# EAGLE board covid-respirator-ProtoB (EAGLE 7.3.0)

Size 160 x 100 mm. Coordinates in mm from the lower left corner, seen from the top.
Outline: 0,0 160,0 160,100 0,100 0,0
Copper layers (1*16): Top 0.035mm / dielectric 1.5mm / Bottom 0.035mm
Design rules "default": minimum track width 10mil, minimum drill 24mil, track to track 8mil, track to pad 8mil, pad to pad 8mil, via to via 8mil, smd to smd 8mil, copper to edge 40mil, drill to drill 8mil, minimum pad ring 10mil, minimum via ring 8mil, stop-mask expansion 4mil, vias tented up to drill 0mil, thermal gap 10mil

## Footprints (pad centres in the part's own frame; a part is rotated, then mirrored left to right if it is on the bottom)
AB9V = drill 1.118 pad 3.15 octagon: + 0,2.54; - 0,-2.54
150CLZ-1010 = smd 4.3 x 2.5: + 4.15,0; - -4.15,0
C050-050X075 = drill 0.813 octagon: 1 -2.54,0; 2 2.54,0
SO8 = smd 0.6 x 2.2: 1 -1.905,-2.6; 2 -0.635,-2.6; 3 0.635,-2.6; 4 1.905,-2.6; 5 1.905,2.6; 6 0.635,2.6; 7 -0.635,2.6; 8 -1.905,2.6
TO220H = drill 1.118 long: 1 -2.54,-10.16; 2 0,-10.16; 3 2.54,-10.16 | hole 3.302: 0,4.826
HY-1602F = drill 1 pad 1.93 long: 1 2.54,0; 2 5.08,0; 3 7.62,0; 4 10.16,0; 5 12.7,0; 6 15.24,0; 7 17.78,0; 8 20.32,0; 9 22.86,0; 10 25.4,0; 11 27.94,0; 12 30.48,0; 13 33.02,0; 14 35.56,0; 15 38.1,0; 16 40.64,0 | hole 2.5: -2.96,0; 72.04,0; -2.96,-31; 72.04,-31
LED3MM = drill 0.813 octagon: A -1.27,0; K 1.27,0
0207/10 = drill 0.813 octagon: 1 -5.08,0; 2 5.08,0
TL3XYO = drill 1.1 pad 1.422 long: 1 -2.54,0; 2 0,0; 3 2.54,0 | drill 1.1 pad 1.676: M1 -5.08,0; M2 5.08,0
F/EB20P = drill 1.016 pad 2.159 octagon: + 12.7,0; - -12.7,0
TO92-CBE = drill 0.813 long: B 0,0; C -2.54,0; E 2.54,0

## Placement (x,y rotation side)
BATTERY  12V  [AB9V]  -17.78,30.48 0 top  (outside the outline)
C1  47uF/25V  [150CLZ-1010]  -30.48,30.48 0 top  (outside the outline)
C2  10uF/25v  [150CLZ-1010]  -44.45,30.48 0 top  (outside the outline)
C3  100nF  [C050-050X075]  -16.51,39.37 0 top  (outside the outline)
C4  100nF  [C050-050X075]  -25.4,39.37 0 top  (outside the outline)
C5  47uF/6V  [150CLZ-1010]  -78.74,-328.93 0 top  (outside the outline)
C6  47uF/6V  [150CLZ-1010]  -78.74,-340.36 0 top  (outside the outline)
C7  10uF  [150CLZ-1010]  -78.74,-351.79 0 top  (outside the outline)
C8  10uF  [150CLZ-1010]  -78.74,-363.22 0 top  (outside the outline)
C9  10uF/25v  [150CLZ-1010]  -78.74,-424.18 0 top  (outside the outline)
C10  100nF  [C050-050X075]  -81.28,-434.34 0 top  (outside the outline)
C11  100nF  [C050-050X075]  -81.28,-441.96 0 top  (outside the outline)
C12  47uF/6V  [150CLZ-1010]  -78.74,-450.85 0 top  (outside the outline)
C13  10uF  [150CLZ-1010]  -78.74,-462.28 0 top  (outside the outline)
IC1  [SO8]  -72.39,-45.72 0 top  (outside the outline)
IC2  L7805CV-DG  [TO220H]  -33.02,12.7 0 top  (outside the outline)
IC3  AD8607R  [SO8]  -72.39,-66.04 0 top  (outside the outline)
IC4  AD8607R  [SO8]  -72.39,-76.2 0 top  (outside the outline)
LCD1  LCD_2X16_SIL  [HY-1602F]  -69.85,-95.25 0 top  (outside the outline)
LED1  ROUGE  [LED3MM]  -82.55,-279.4 0 top  (outside the outline)
LED2  VERTE  [LED3MM]  -82.55,-284.48 0 top  (outside the outline)
LED3  JAUNE  [LED3MM]  -82.55,-314.96 0 top  (outside the outline)
R1  1.5k  [0207/10]  -71.12,-83.82 0 top  (outside the outline)
R2  4k7  [0207/10]  -19.05,45.72 0 top  (outside the outline)
R3  1k  [0207/10]  -31.75,45.72 0 top  (outside the outline)
R4  1.5k  [0207/10]  -71.12,-88.9 0 top  (outside the outline)
R5  100  [0207/10]  -19.05,50.8 0 top  (outside the outline)
R6  12k  [0207/10]  -62.23,-27.94 0 top  (outside the outline)
R7  1.2k  [0207/10]  -62.23,-33.02 0 top  (outside the outline)
R8  150  [0207/10]  -71.12,-133.35 0 top  (outside the outline)
R9  150  [0207/10]  -71.12,-53.34 0 top  (outside the outline)
R10  680  [0207/10]  -71.12,-58.42 0 top  (outside the outline)
R11  9k1  [0207/10]  -78.74,-476.25 0 top  (outside the outline)
R12  68k  [0207/10]  -78.74,-229.87 0 top  (outside the outline)
R13  33k  [0207/10]  -78.74,-234.95 0 top  (outside the outline)
R14  22k  [0207/10]  -78.74,-240.03 0 top  (outside the outline)
R15  12k  [0207/10]  -78.74,-245.11 0 top  (outside the outline)
R16  8.2k  [0207/10]  -78.74,-275.59 0 top  (outside the outline)
R17  8.2k  [0207/10]  -78.74,-255.27 0 top  (outside the outline)
R18  5.6k  [0207/10]  -78.74,-260.35 0 top  (outside the outline)
R19  3.3k  [0207/10]  -78.74,-265.43 0 top  (outside the outline)
R20  2.2k  [0207/10]  -78.74,-270.51 0 top  (outside the outline)
R21  270  [0207/10]  -78.74,-290.83 0 top  (outside the outline)
R22  270  [0207/10]  -78.74,-295.91 0 top  (outside the outline)
R23  10k  [0207/10]  -78.74,-300.99 0 top  (outside the outline)
R24  10k  [0207/10]  -78.74,-306.07 0 top  (outside the outline)
R25  10k  [0207/10]  -78.74,-311.15 0 top  (outside the outline)
R26  270  [0207/10]  -78.74,-321.31 0 top  (outside the outline)
R27  10k  [0207/10]  -78.74,-406.4 0 top  (outside the outline)
R28  10k  [0207/10]  -78.74,-411.48 0 top  (outside the outline)
R29  10k  [0207/10]  -78.74,-416.56 0 top  (outside the outline)
R30  10k  [0207/10]  -78.74,-471.17 0 top  (outside the outline)
R31  330  [0207/10]  -78.74,-481.33 0 top  (outside the outline)
S1  TL32YO  [TL3XYO]  -78.74,-140.97 0 top  (outside the outline)
S2  TL32YO  [TL3XYO]  -78.74,-152.4 0 top  (outside the outline)
S3  TL32YO  [TL3XYO]  -78.74,-163.83 0 top  (outside the outline)
S4  TL32YO  [TL3XYO]  -78.74,-175.26 0 top  (outside the outline)
S5  TL32YO  [TL3XYO]  -78.74,-186.69 0 top  (outside the outline)
S6  TL32YO  [TL3XYO]  -78.74,-198.12 0 top  (outside the outline)
S7  TL32YO  [TL3XYO]  -78.74,-209.55 0 top  (outside the outline)
S8  TL32YO  [TL3XYO]  -78.74,-220.98 0 top  (outside the outline)
S9  TL32YO  [TL3XYO]  -78.74,-374.65 0 top  (outside the outline)
S10  TL32YO  [TL3XYO]  -78.74,-386.08 0 top  (outside the outline)
S11  TL32YO  [TL3XYO]  -78.74,-397.51 0 top  (outside the outline)
SG1  [F/EB20P]  -36.83,-12.7 0 top  (outside the outline)
T2  BC548  [TO92-CBE]  -64.77,-20.32 0 top  (outside the outline)

## Library data of the parts
BATTERY = battery
C1-C13 R1-R31 = rcl
IC1 = analog-devices; MF: ALTERA CORPORATION; MPN: AD825ARZ; OC_FARNELL: 9603735; OC_NEWARK: 59K6528
IC2 = linear
IC3 IC4 = analog-devices; MPN: AD8607ARMZ-R2; OC_FARNELL: 1651293; OC_NEWARK: 19M8927
LCD1 = lcd_2x16_led_backlight
LED1-LED3 = led
S1-S11 = switch
SG1 = buzzer; OC_FARNELL: unknown; OC_NEWARK: unknown
T2 = transistor

## Nets
6546876: C4.1 IC1.3 R5.1
+3.3VNUCLEO: R16.1 S9.2 S10.2 S11.2
+5V_S1: C5.+
+5V_S2: C6.+ C12.+
+5VNUCLEO: IC3.4 IC4.8 LCD1.2 R1.1 R8.1 R11.2
+12V: C1.+ C7.+ C8.+ C10.1 C11.1 C13.+ IC2.1 R2.2 SG1.+
A0: R12.2 R13.2 R14.2 R15.2 R16.2 R17.2 R18.2 R19.2 R20.2
A1: R9.1 R10.1
A2: R2.1 R3.2
AGND: C1.- C2.- C3.2 C4.2 C11.2 IC1.4 IC2.2 R10.2
AREF: C2.+ C3.1 IC1.7 IC2.3
D2: IC3.3 R24.1
D3: IC4.5 R30.1
D4: IC3.5 R23.1
D5: IC4.3 R25.1
D7: LCD1.4
D8: LCD1.6
D9: LCD1.11
D10: LCD1.12
D11: LCD1.13
D12: LCD1.14
D13: R7.2
E5V: C9.+
GND: C5.- C6.- C7.- C8.- C9.- C10.2 C12.- C13.- IC3.8 IC4.4 LCD1.1 LCD1.5 LCD1.16 R3.1 R4.2 R6.2 R21.2 R22.2 R23.2 R24.2 R25.2 R26.2 R27.2 R28.2 R29.2 R30.2 R31.1 S1.2 S2.2 S3.2 S4.2 S5.2 S6.2 S7.2 S8.2 T2.E
N$1: IC4.1
N$2: BATTERY.-
N$3: BATTERY.+
N$4: IC3.2 IC3.6 IC4.2 IC4.6 R1.2 R4.1
N$5: IC3.1
N$6: IC3.7
N$7: LCD1.15 R8.2
N$8: IC1.2 IC1.6 R9.2
N$9: R5.2
N$10: LCD1.3 R11.1 R31.2
N$11: R12.1 S8.1
N$12: SG1.- T2.C
N$13: R6.1 R7.1 T2.B
N$14: R13.1 S7.1
N$15: R14.1 S6.1
N$16: R15.1 S5.1
N$17: IC4.7
N$18: R17.1 S4.1
N$19: R18.1 S3.1
N$20: R19.1 S2.1
N$21: R20.1 S1.1
N$22: LED3.K R26.1
N$23: LED1.K R21.1
N$24: LED2.K R22.1
PB1: R28.1 S10.1
PB2: R29.1 S9.1
PB13: LED2.A
PB14: LED3.A
PB15: R27.1 S11.1
PC4: LED1.A

## Tracks (layer width: path | path; a pad name or v marks a point on that pad's centre or on a via)
6546876  (2 unrouted)
+3.3VNUCLEO  (3 unrouted)
+5V_S2  (1 unrouted)
+5VNUCLEO  (5 unrouted)
+12V  (8 unrouted)
A0  (8 unrouted)
A1  (1 unrouted)
A2  (1 unrouted)
AGND  (7 unrouted)
AREF  (3 unrouted)
D2  (1 unrouted)
D3  (1 unrouted)
D4  (1 unrouted)
D5  (1 unrouted)
GND  (35 unrouted)
N$4  (5 unrouted)
N$7  (1 unrouted)
N$8  (2 unrouted)
N$10  (2 unrouted)
N$11  (1 unrouted)
N$12  (1 unrouted)
N$13  (2 unrouted)
N$14  (1 unrouted)
N$15  (1 unrouted)
N$16  (1 unrouted)
N$18  (1 unrouted)
N$19  (1 unrouted)
N$20  (1 unrouted)
N$21  (1 unrouted)
N$22  (1 unrouted)
N$23  (1 unrouted)
N$24  (1 unrouted)
PB1  (1 unrouted)
PB2  (1 unrouted)
PB15  (1 unrouted)